# Altium PCB FanControl.PcbDoc
Units mil, origin at the board's own origin, x right, y up, seen from the top; angles counter-clockwise.
Board outline 2285 x 2545 mil, 2 copper layers (Top Layer, Bottom Layer); 9 components, 11 nets, 81 pads, 0 vias.
Unrouted connection lines stored in the file: 1.
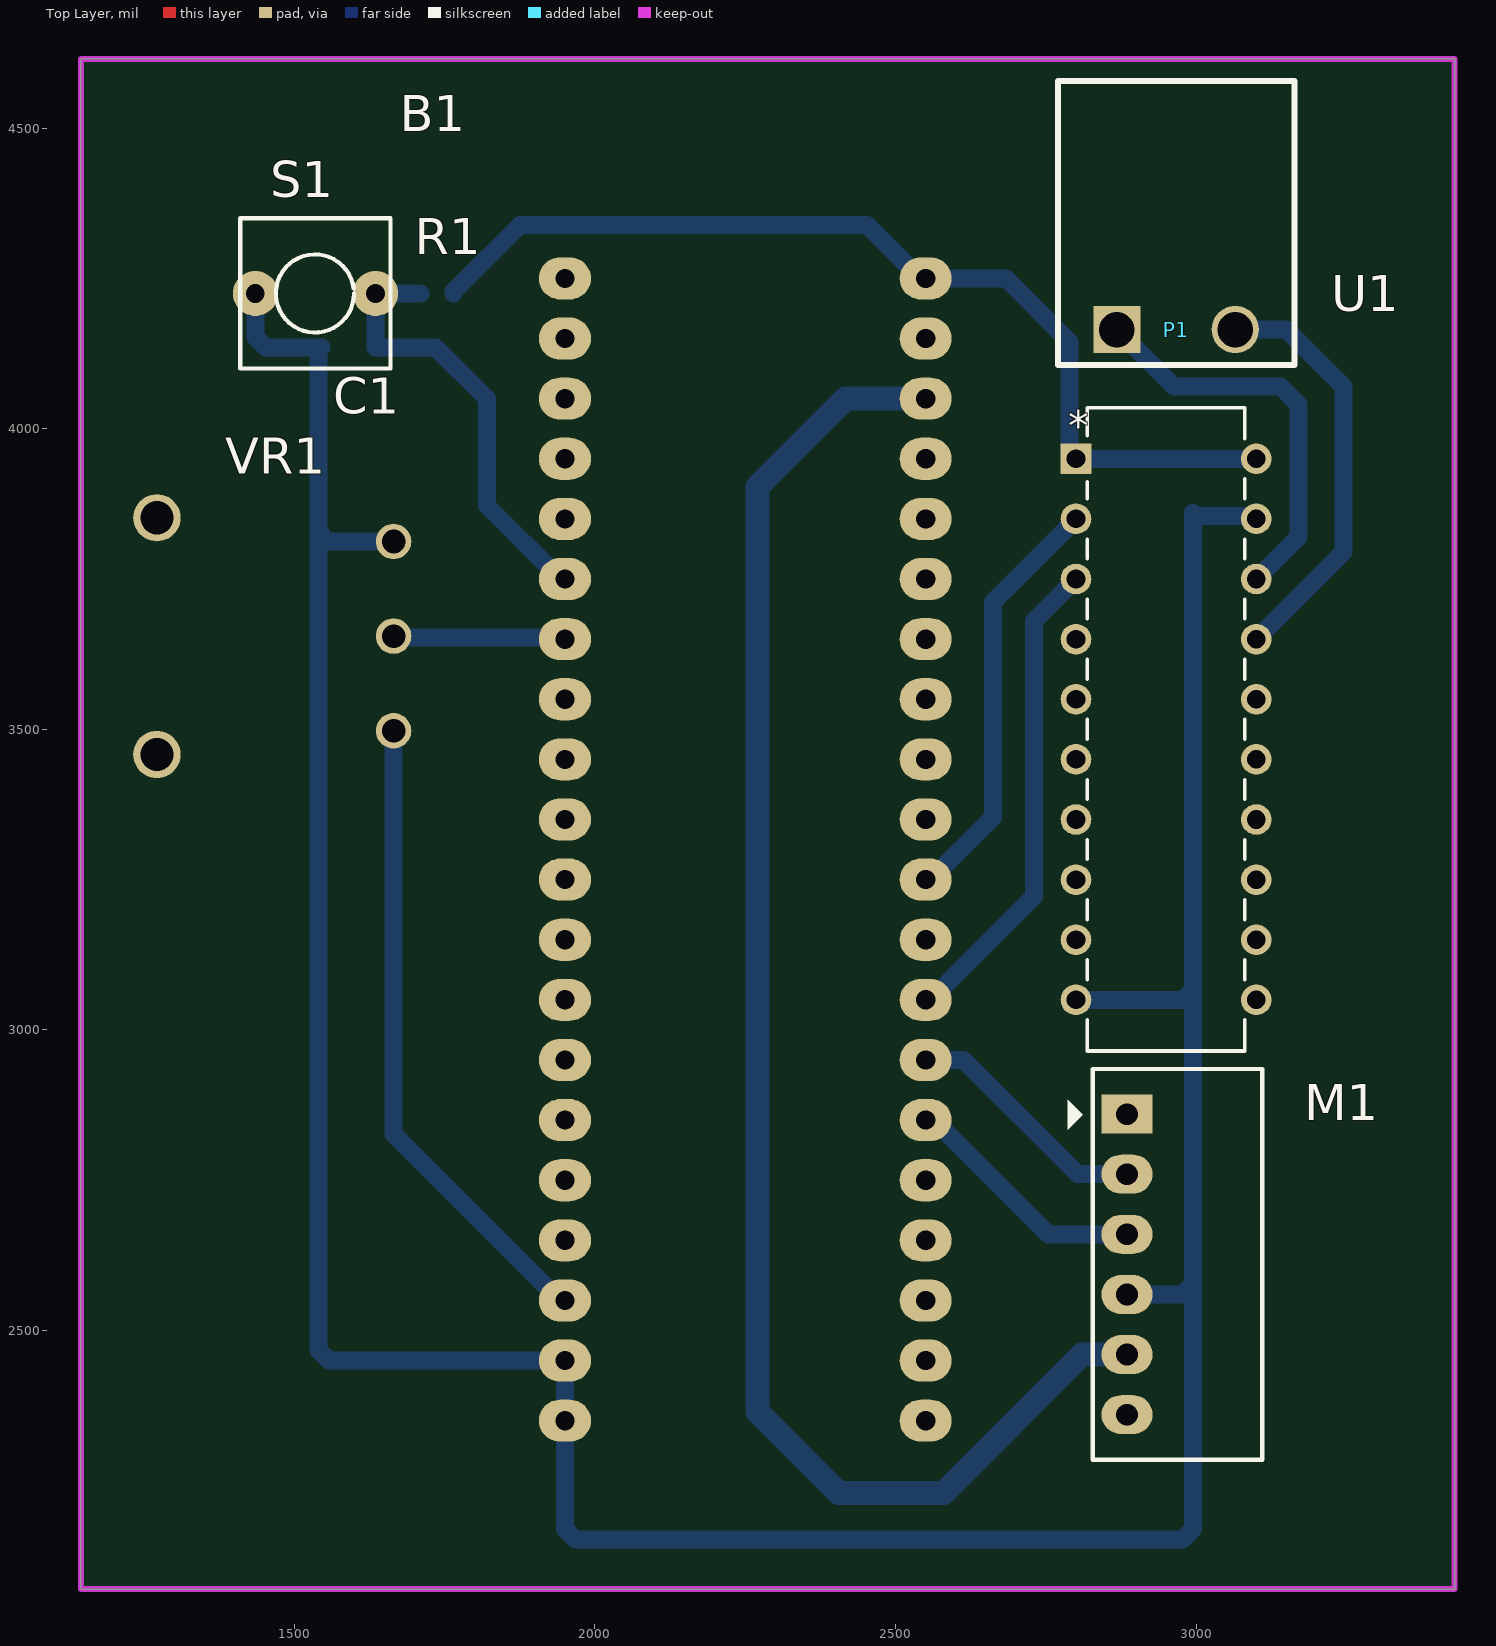
[diagram p0: Top Layer view]
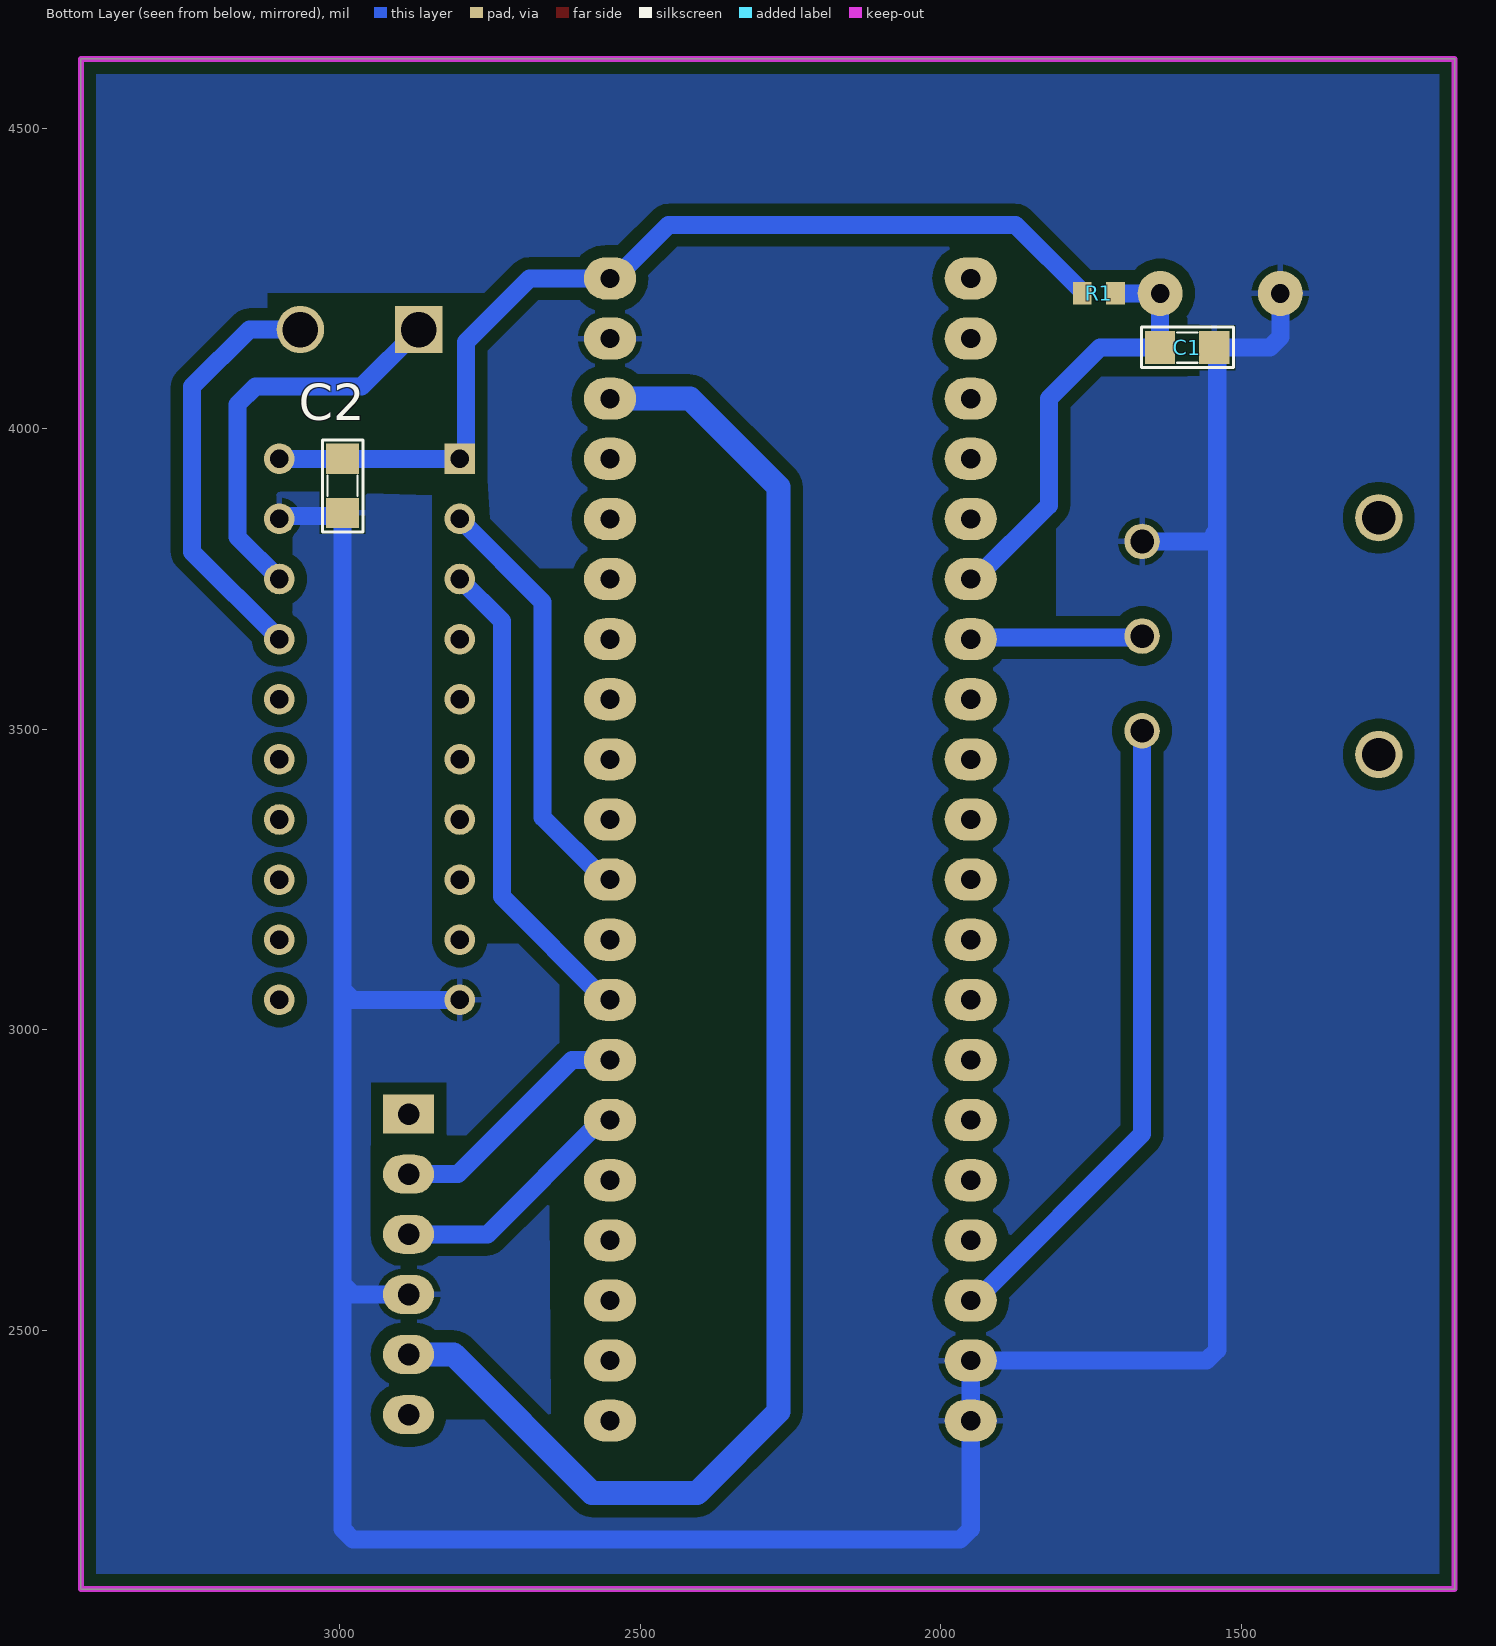
[diagram p1: Bottom Layer view, seen from below]
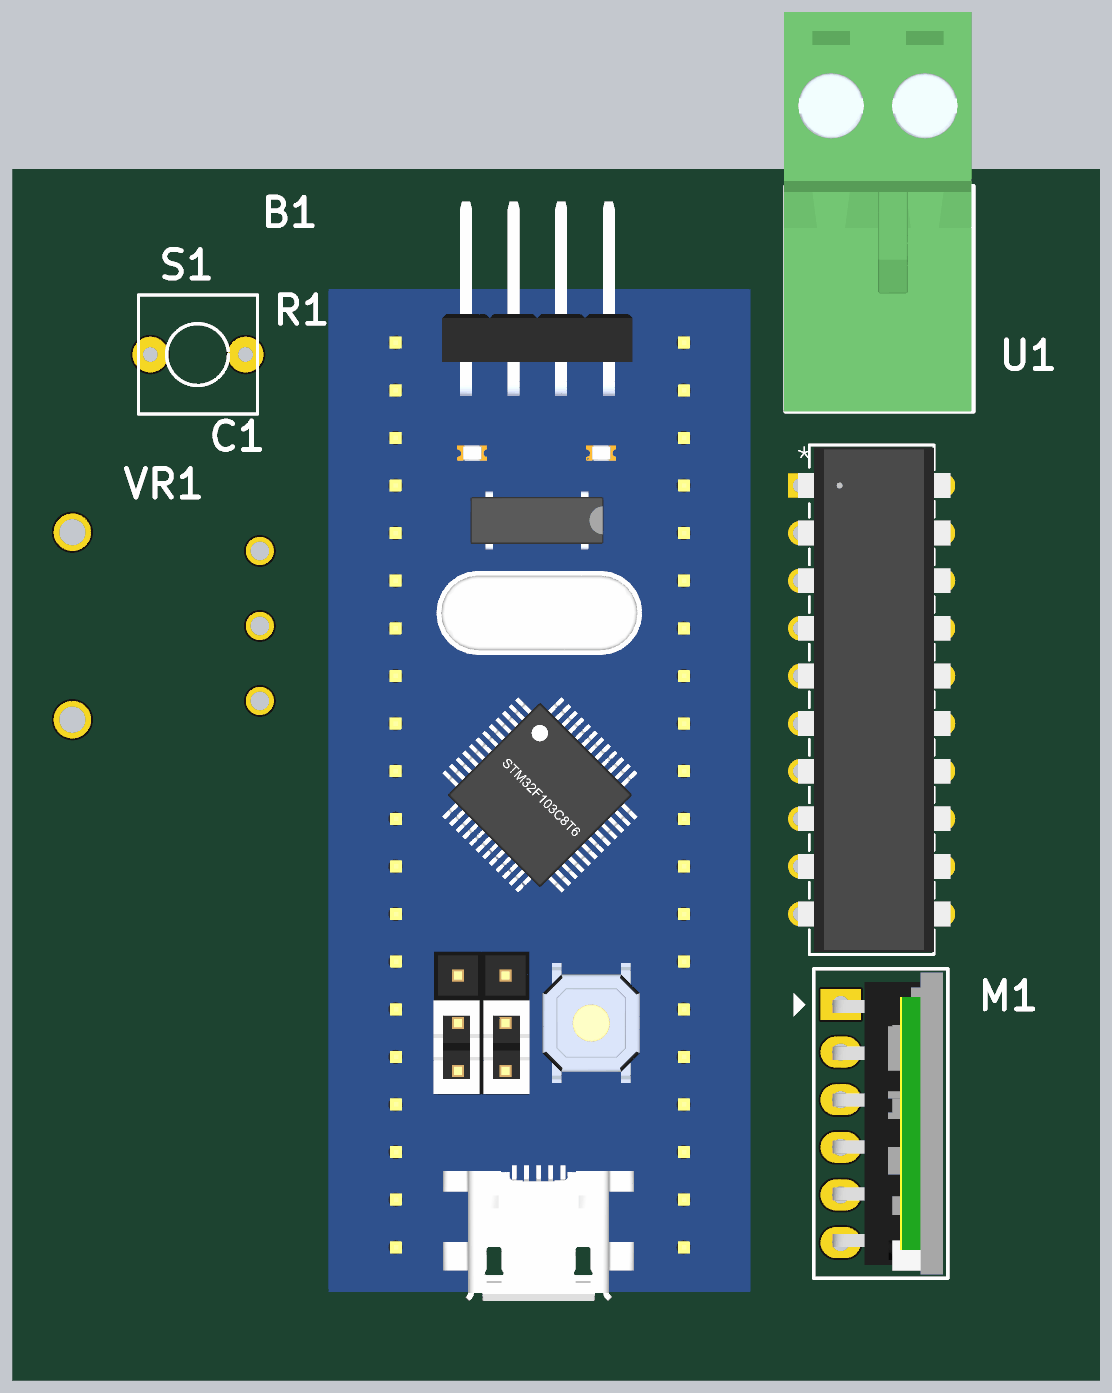
[diagram p2: 3D render of the assembled board from above, using the file's embedded part models]
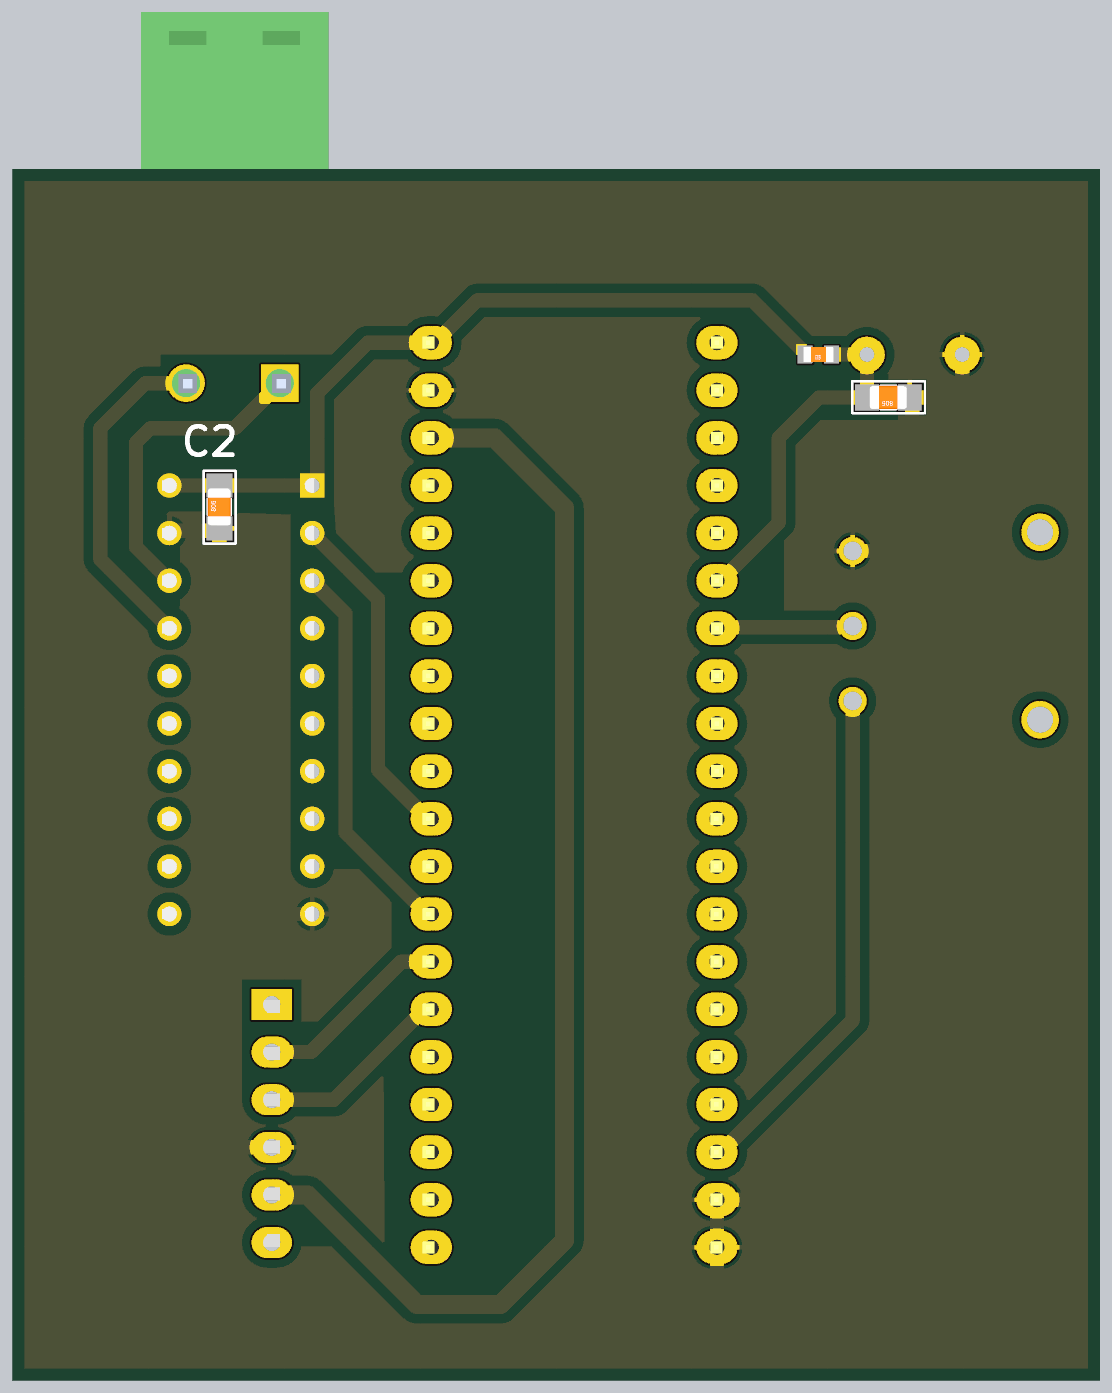
[diagram p3: 3D render of the assembled board from below, using the file's embedded part models]

## Layer stack, top to bottom
Top Solder: solder mask 0.4, Solder Resist, Dk 3.5
Top Layer: signal copper 1.4
Dielectric 1: dielectric 12.6, FR-4, Dk 4.8
Bottom Layer: signal copper 1.4
Bottom Solder: solder mask 0.4, Solder Resist, Dk 3.5

## Board outline
1145,2070 1145,4615 3430,4615 3430,2070

## Design rules (kind name [scope] priority, off if disabled: settings)
Clearance [All] p1: gap=20 ignorepadtopadclearanceinfootprint=FALSE
PolygonConnect [All] p1: connectstyle=Relief reliefconductorwidth=10 reliefentries=4 polygonreliefangle="90 Angle" airgapwidth=10
RoutingVias [All] p1: holewidth=28 width=50 viastyle="Through Hole" minholewidth=28 minwidth=50 maxholewidth=28 maxwidth=50
SolderMaskExpansion [All] p1: expansion=4 istentingtop=FALSE
Width [All] p1: maxlimit=50 minlimit=15 preferedwidth=30 minimp=50.000000 maximp=50.000000 favimp=50.000000
30 further rules are at their usual default settings.

## Components (designator, comment, footprint, x,y, rotation, side; value= is the part's Value field where it differs from the comment)
B1 "BluePill" BlUEPILL 1950,2350 r0 top
C1 "Cap Non-Pol SMD" CAP-SM-0805 1545,4135 r0 bottom value=100nF
C2 "Cap Non-Pol SMD" CAP-SM-0805 2995,3860 r90 bottom value=100nF
M1 "HC-05-06-TH" HC-05-06-TH 2880,2860 r180 top
P1 "terminal 2p 5mm" "terminal 2p 5mm" 2868.15,4165 r0 top
R1 "RESISTOR SMD" RES-SM-0603 1710,4225 r0 bottom value=10K
S1 "Tact SW - 2Pin" SW2 1435,4225 r0 top
U1 "74HC245N" 74HC245N 2800,3950 r0 top
VR1 "W16X2_503" W16X2_503 1665,3655 r90 top

## Footprints (in the part's own frame and the unit in brackets; to place one, negate y for a bottom-side part, rotate by r counter-clockwise, add the part's x,y. Pads: shape width x height; smd on the part's side, far side on the other; paste and mask are expansions set on the pad)
74HC245N [mil]
  rect 51x51 hole 31 mask+0: 1(0,0)
  round 51 hole 31 mask+0: 2(0,-100) 3(0,-200) 4(0,-300) 5(0,-400) 6(0,-500) 7(0,-600) 8(0,-700) 9(0,-800) 10(0,-900) 11(300,-900) 12(300,-800) 13(300,-700) 14(300,-600) 15(300,-500) 16(300,-400) 17(300,-300) 18(300,-200) 19(300,-100) 20(300,0)
  silkscreen extent 19,-985 281,85, body extent -5,-980 315,80, height 170
BlUEPILL [mil]
  oval 86.61x70 hole 32: 1(0,1900) 2(0,1800) 3(0,1700) 4(0,1600) 5(0,1500) 6(0,1400) 7(0,1300) 8(0,1200) 9(0,1100) 10(0,1000) 11(0,900) 12(0,800) 13(0,700) 14(0,600) 15(0,500) 16(0,400) 17(0,300) 18(0,200) 19(0,100) 20(0,0) 21(600,0) 22(600,100) 23(600,200) 24(600,300) 25(600,400) 26(600,500) 27(600,600) 28(600,700) 29(600,800) 30(600,900) 31(600,1000) 32(600,1100) 33(600,1200) 34(600,1300) 35(600,1400) 36(600,1500) 37(600,1600) 38(600,1700) 39(600,1800) 40(600,1900)
  body extent -141,-113 745,2196, height 571
CAP-SM-0805 [mil]
  rect 50x55 smd: 1(0,0) 2(90,0)
  silkscreen extent -32,-34 121,33, body extent 6,-25 84,25, height 31
HC-05-06-TH [mil]
  rect 85x65 hole 36: 1(-5,0)
  oval 85x65 hole 36: 2(-5,100) 3(-5,200) 4(-5,300) 5(-5,400) 6(-5,500)
  silkscreen extent -230,-75 94,575, body extent -220,-67 12,567, height 1500
RES-SM-0603 [mm]
  rect 0.8x0.95 smd: 1(-0.014,0) 2(1.386,0)
  body extent -0.11,-0.4 1.49,0.4, height 0.3
SW2 [mil] "SW button 2pin, 250x 250 mil"
  round 75 hole 31: 1(0,0) 2(200,0)
  silkscreen extent -25,-125 225,125
"terminal 2p 5mm" [mm]
  rect 2x2 hole 1.5: 1(0,0)
  round 2 hole 1.5: 2(5,0)
  silkscreen extent -2.5,-1.5 7.5,10.5, body extent -2.59,-1.52 7.41,19.79, height 15.1
W16X2_503 [mm]
  round 1.5 hole 1: 1(-4,0) 2(0,0) 3(4,0)
  round 2 hole 1.4: 4(-5,10) 5(5,10)

## Part data
C1 C2: "Capacitor"
R1: "Resistor"
S1: "Switch button 2 pin"
U1: "No Description Available", Mfr_Name=NXP, Copyright="Copyright (C) 2022 Ultra Librarian. All rights reserved.", Manufacturer_Part_Number=74HC245N, RefDes=RefDes, Type=DEV
M1: Local Supplier=thegioiic, Local Supplier Link=https://www.thegioiic.com/products/hc-05-thu-phat-bluetooth-ra-chan-master-slave

## Nets (pads, with @x,y where several pads share a name; then routed paths per layer and width w, separated by ;. In a path a pad name is that pad's centre, name@x,y a point inside that pad or via, vN(x,y) a via of type N, cw(c..) or ccw(c..) an arc to the next point about the centre after c; other vN are vias at no path point)
3V3: B1.18 B1.40 C2.2 R1.2 U1.1 U1.20 VR1.1 | length 2731
  Bottom Layer w30: VR1.1 1665,2826.69 1941.69,2550 B1.18 ; R1.2 1764.56,4227.95 1875.61,4339 2452.69,4339 2541.69,4250 B1.40@2557.3,4250 ; B1.40 2684,4250 2789.5,4144.5 2789.5,3960.5 U1.1 C2.2 U1.20
5V: B1.38 M1.5 | length 2645.1
  Bottom Layer w40: B1.38 2417,4050 2270,3903 2270,2365 2405,2230 2580,2230 2810,2460 M1.5
ADC: B1.7 VR1.2 | length 287.1
  Bottom Layer w30: VR1.2 1667.5,3652.5 1947.5,3652.5 B1.7
BUTTON: B1.6 C1.2 R1.1 S1.2 | length 742.8
  Bottom Layer w30: R1.1 S1.2 C1.2 1735,4135 1820,4050 1820,3872.7 1942.7,3750 B1.6
DIR: B1.28 U1.3 | length 808.4
  Bottom Layer w30: B1.28 2558.31,3050 2730,3221.69 2730,3680 U1.3
GND: B1.19 B1.20 B1.39 C1.1 C2.1 M1.4 S1.1 U1.10 U1.19 VR1.3 | length 5855.6
  Bottom Layer w30: S1.1 1435,4152.57 1452.57,4135 C1.1 1540,4130 1540,2467.57 1557.57,2450 B1.19 B1.20 1950,2169.57 1967.57,2152 2977.43,2152 2995,2169.57 2995,2577.57 ; 1545,3812.48 1545,3825.05 ; 1557.57,3812.48 VR1.3 ; U1.10 2977.43,3050 2995,3067.57 ; M1.4 2977.43,2560 2995,2577.57 ; U1.19 3094.32,3850 3089.32,3855 3000,3855 C2.1 2995,3067.57 ; 2995,2577.57 2995,3067.57
NetP1_1: P1.1 U1.18 | length 672.6
  Bottom Layer w30: P1.1 2963.15,4070 3140,4070 3170,4040 3170,3820 U1.18
NetP1_2: P1.2 U1.17 | length 699.4
  Bottom Layer w30: P1.2 3150,4165 3245,4070 3245,3795 U1.17
PWM: B1.30 U1.2 | length 708.4
  Bottom Layer w30: B1.30 2558.31,3250 2662,3353.69 2662,3712 U1.2
RX_BLU: B1.26 M1.3 | length 413.7
  Bottom Layer w30: B1.26 2564,2850 2754,2660 M1.3
TX_BLU: B1.27 M1.2 | length 413.7
  Bottom Layer w30: B1.27 2613,2950 2803,2760 M1.2
pads on no net: B1.1 B1.2 B1.3 B1.4 B1.5 B1.8 B1.9 B1.10 B1.11 B1.12 B1.13 B1.14 B1.15 B1.16 B1.17 B1.21 B1.22 B1.23 B1.24 B1.25 B1.29 B1.31 B1.32 B1.33 B1.34 B1.35 B1.36 B1.37 M1.1 M1.6 U1.4 U1.5 U1.6 U1.7 U1.8 U1.9 U1.11 U1.12 U1.13 U1.14 U1.15 U1.16 VR1.4 VR1.5

## Polygon pours and split planes (outlines as drawn)
GND on Bottom Layer "GND_L02_P000" (solid, remove dead copper, pour order 0): 1145,4615 3430,4615 3430,2070 1145,2070

## Keep-outs
Keep-Out Layer:
  the board outline again, w10

## Other copper
Bottom Layer:
  pour cut-out: 2650,2715 2648,2354 2617.78,2354 2613.78,2350
  pour cut-out: 2831.99,2358.99 2825,2352 2759,2352 2759,2362 2763,2366
  pour cut-out: 2947.5,2807.5 2947.95,2807.05 2947.95,2660 2942,2660 2940,2662
  pour cut-out: 2759,4225 3119,4225 3119,4199.84
  pour cut-out: 1680,4099.7 1680,4087.5 1732.58,4087.5 1720.38,4099.7
  pour cut-out: 1590,4173 1570,4173 1570,4088 1589.5,4088 1590,4087.5
  pour cut-out: 1809,3687 1809,3842 1921,3722 1921,3687
  pour cut-out: 3078.2,3821.59 3078.2,3696.63 3082.44,3692.4 3084.04,3694 3111,3694
  pour cut-out: 3105,3814.59 3105,3805 3111.05,3811.05
  pour cut-out: 3032.5,3895 3105.54,3895 3105.99,3895.45 3100.99,3900.45 3100.99,3903.86
  pour cut-out: 2845.6,3915 3106,3915 3106,3904.51 3032.5,3895 2845,3889
  pour cut-out: 3105,3885.41 3105.99,3886.4 3105.99,3904.5 3114.46,3904.5 3117.56,3907.6
  pour cut-out: 2630.65,2980.57 2634,2983.92 2634,3075 2619,3075 2606,3062
  pour cut-out: 2822,2824 2788,2824 2790,2816 2804,2802
  pour cut-out: 2611.89,3764.36 2614.53,3767 2668,3767 2668,3755 2661,3748
  pour cut-out: 2845.6,3915 2754.4,3915 2703,3144.31 2845.6,3144.31
  pour cut-out: 2772.06,3113.59 2770.86,3114.8 2769.65,3116

## Text inside footprints (layer, text, board x,y; h text height)
U1: Top Overlay "*" at 2787.5,3980.5 h50; Mechanical 13 "*" at 2821.5,3925 h50